# EAGLE board TiltyDuo Panel (EAGLE 6.5.0)
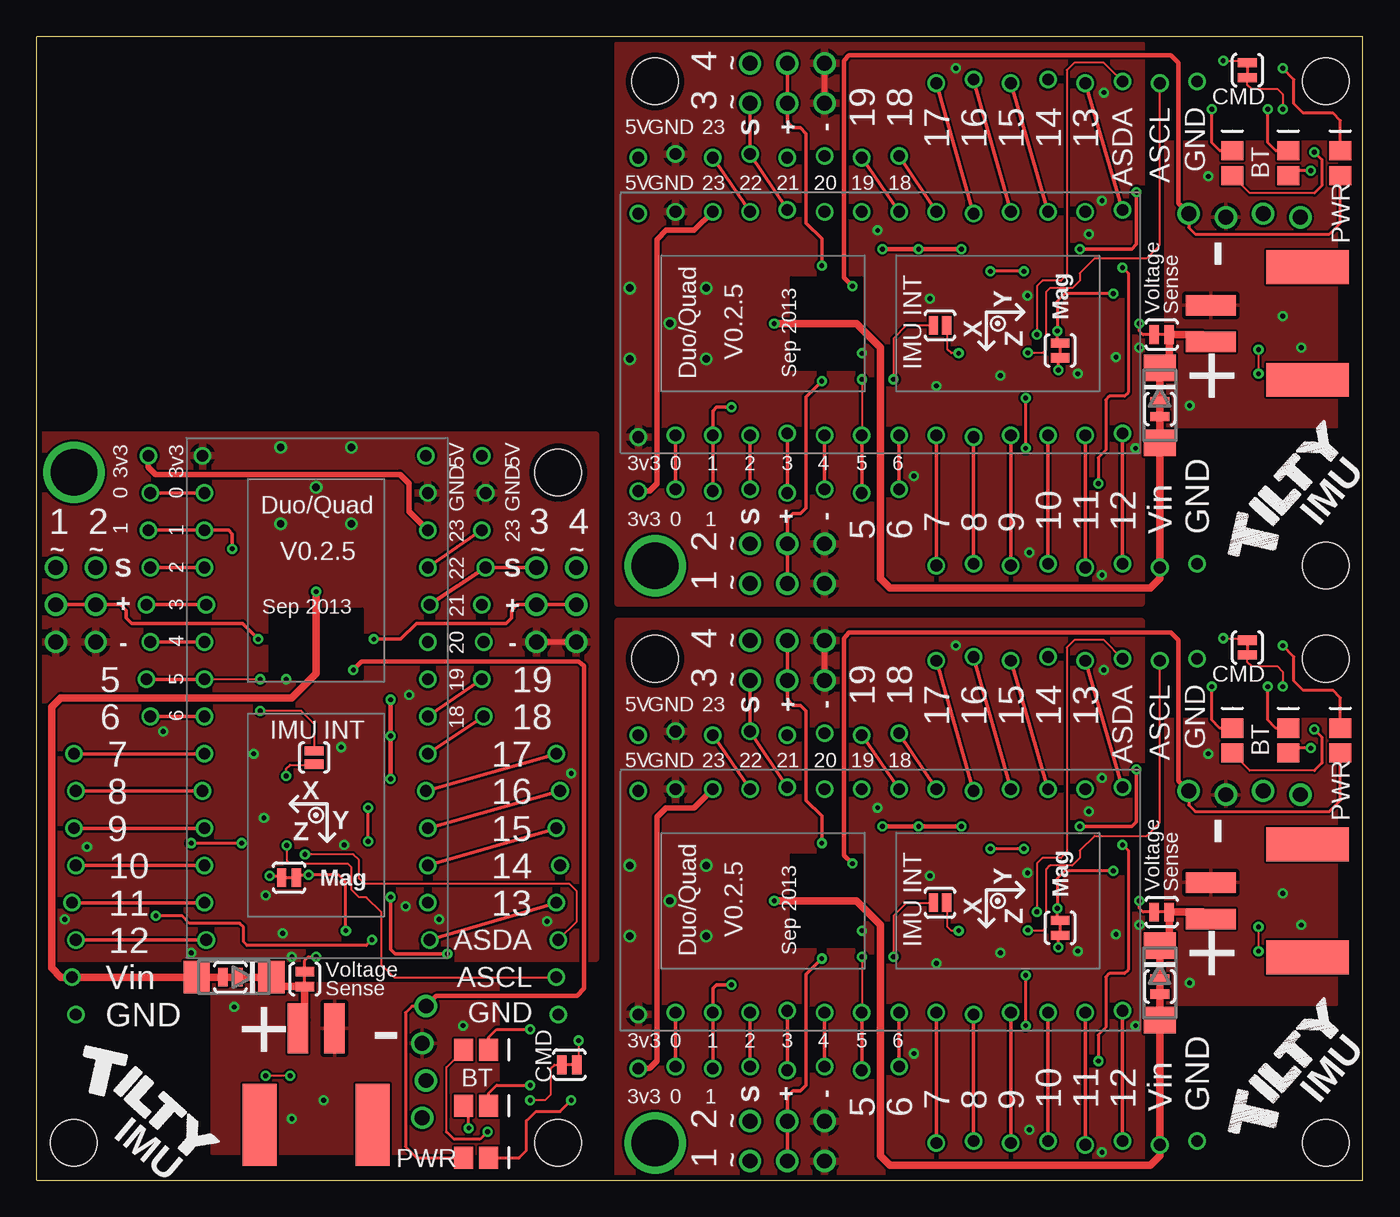
[diagram p0: board, top side]
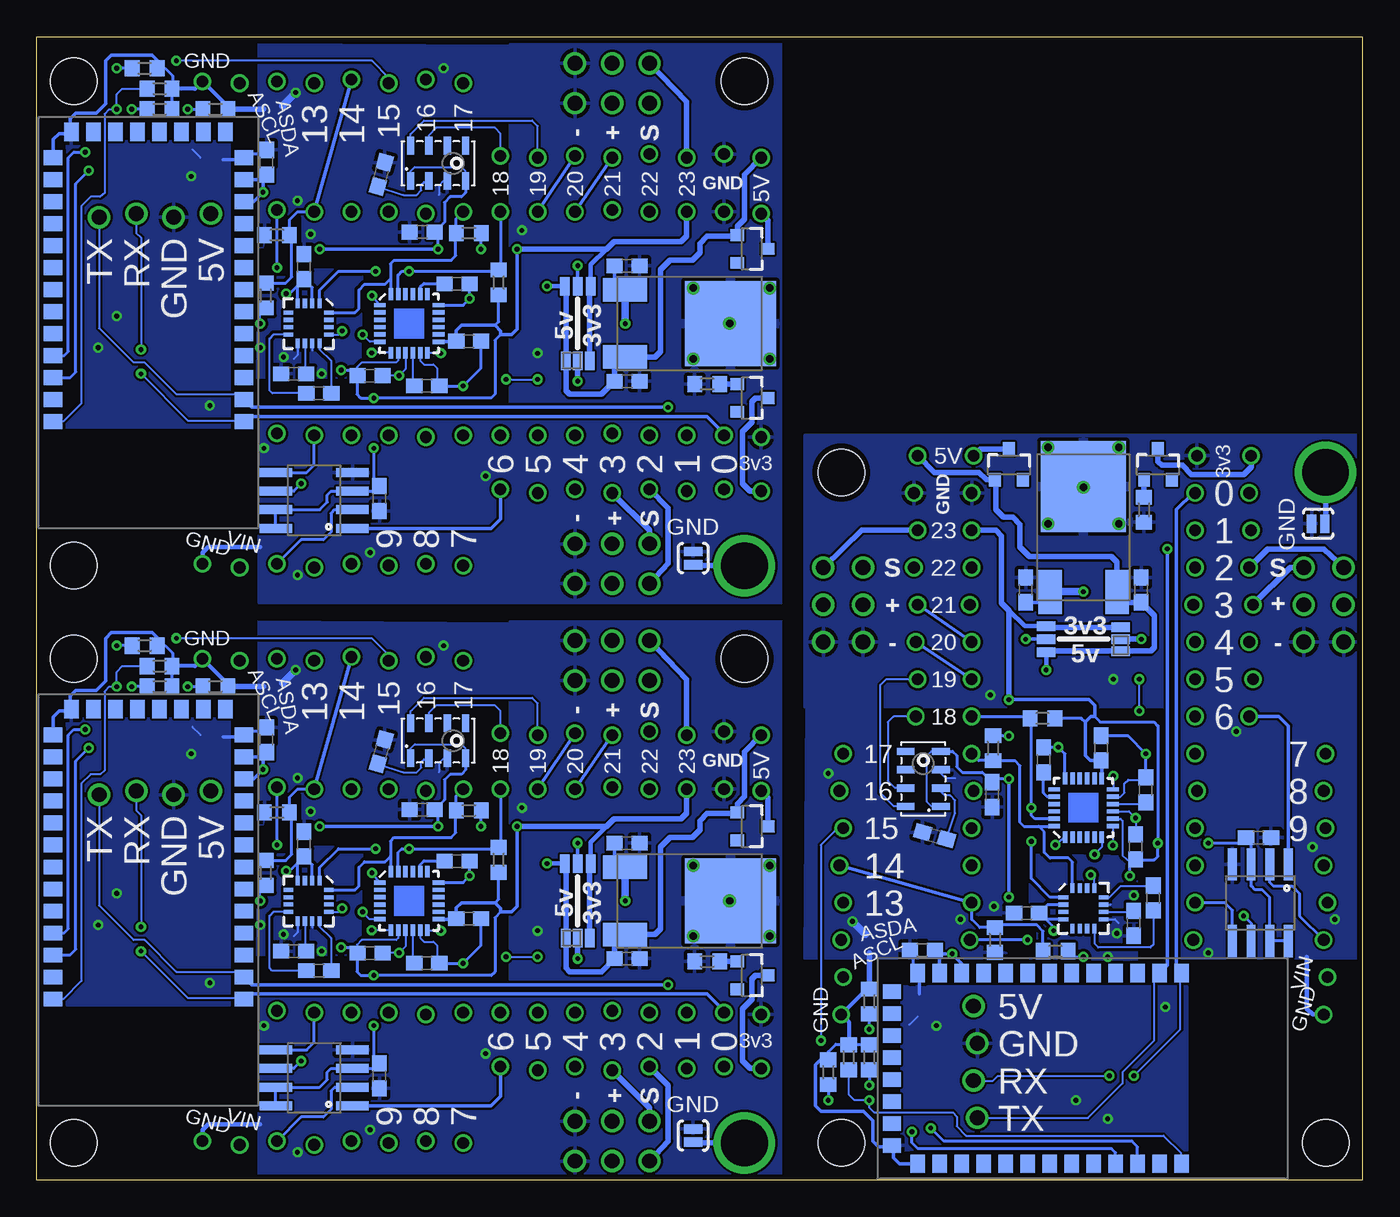
[diagram p1: board, bottom side, seen from below]

Size 90.42 x 77.98 mm. Coordinates in mm from the lower left corner, seen from the top.
Outline: 0,0 90.42,0 90.42,77.98 0,77.98 0,0
Copper layers (1*16): Top 0.0356mm / dielectric 1.5011mm / Bottom 0.0356mm
Design rules "LaenPCBOrder": minimum track width 6mil, minimum drill 13mil, track to track 6mil, track to pad 6mil, pad to pad 6mil, via to via 6mil, smd to smd 6mil, copper to edge 15mil, drill to drill 6mil, minimum pad ring 7mil, minimum via ring 7mil, stop-mask expansion 4mil, vias tented up to drill 0mil, thermal gap 10mil
Holes 3.17 mm at 35.56,48.26 35.56,2.54 2.54,2.54 42.16,35.56 87.88,35.56 87.88,2.54 42.16,74.93 87.88,74.93 87.88,41.91

## Footprints (pad centres in the part's own frame; a part is rotated, then mirrored left to right if it is on the bottom)
C0603 = smd 1.1 x 1: 1 -0.85,0; 2 0.85,0
LED-0805 = smd 1.3 x 1.5: 1 -0.85,0; 2 0.85,0
SOT23-3 = smd 0.8 x 0.9: 1 -0.95,-1; 2 0.95,-1; 3 0,1.1
DO214AA = smd 1.8 x 2.2: A 2.55,0; C -2.55,0
8-PIN_RECEPTACLE_LOCK_NO-SS = drill 0.8: P$1 -8.89,-0.127; P$2 -6.35,0.127; P$3 -3.81,-0.127; P$4 -1.27,0.127; P$5 1.27,-0.127; P$6 3.81,0; P$7 6.35,-0.127; P$8 8.89,0
2-POS_SMD_TERMINAL_BLOCK = smd 2.3 x 5.6: P$1 -3.85,-2.325; P$2 3.85,-2.325 | smd 1.4 x 3.4: P$3 -1.25,4.275; P$4 1.25,4.275
2X03_NO_SS_LOCK = drill 1.016: 1 -2.54,-1.359; 2 -2.54,1.359; 3 0,-1.359; 4 0,1.359; 5 2.54,-1.359; 6 2.54,1.359
1X04_NO_SS_LOCKING = drill 1.016: 1 -3.81,0.127; 2 -1.27,-0.127; 3 1.27,0.127; 4 3.81,-0.127
SJ_2S-NO = smd 0.635 x 1.27: 1 -0.45,0; 2 0.45,0
R0603 = smd 1 x 1.1: 1 -0.85,0; 2 0.85,0
SJ_3_PASTE1&2 = smd 0.635 x 1.27: 1 -0.813,0; 2 0,0; 3 0.813,0
SJ_3 = smd 0.635 x 1.27: 1 -0.889,0; 2 0,0; 3 0.889,0
SJ_2S-TRACE = smd 0.635 x 1.27: 1 -0.508,0; 2 0.508,0
28-DIP = drill 0.8: P$1 -7.747,16.51; P$2 -7.62,13.97; P$3 -7.62,11.43; P$4 -7.62,8.89; P$5 -7.493,6.35; P$6 -7.62,3.81; P$7 -7.62,1.27; P$8 -7.62,-1.27; P$9 -7.62,-3.81; P$10 -7.747,-6.35; P$11 -7.62,-8.89; P$12 -7.62,-11.43; P$13 -7.62,-13.97; P$14 -7.493,-16.51; P$15 7.493,16.51; P$16 7.62,13.97; P$17 7.62,11.43; P$18 7.62,8.89; P$19 7.747,6.35; P$20 7.62,3.81; P$21 7.62,1.27; P$22 7.62,-1.27; P$23 7.62,-3.81; P$24 7.493,-6.35; P$25 7.62,-8.89; P$26 7.62,-11.43; P$27 7.62,-13.97; P$28 7.747,-16.51
HC-09_BREAKOUT = smd 1.25 x 1: P$1 -6.5,10.5; P$2 -6.5,9; P$3 -6.5,7.5; P$4 -6.5,6; P$5 -6.5,3; P$6 -6.5,4.5; P$7 -6.5,1.5; P$8 -6.5,0; P$9 -6.5,-1.5; P$10 -6.5,-3; P$11 -6.5,-4.5; P$12 -6.5,-6; P$13 -6.5,-7.5; P$22 6.5,-7.5; P$23 6.5,-6; P$24 6.5,-4.5; P$25 6.5,-3; P$26 6.5,-1.5; P$27 6.5,0; P$28 6.5,1.5; P$29 6.5,3; P$30 6.5,4.5; P$31 6.5,6; P$32 6.5,7.5; P$33 6.5,9; P$34 6.5,10.5 | smd 1 x 1.25: P$14 -5.25,-9.25; P$15 -3.75,-9.25; P$16 -2.25,-9.25; P$17 -0.75,-9.25; P$18 0.75,-9.25; P$19 2.25,-9.25; P$20 3.75,-9.25; P$21 5.25,-9.25
LGA8 = smd 1.2 x 0.5: 1 -1.2,1.875; 2 -1.2,0.625; 3 -1.2,-0.625; 4 -1.2,-1.875; 5 1.2,-1.875; 6 1.2,-0.625; 7 1.2,0.625; 8 1.2,1.875
TO263 = smd 5.791 x 6.198: P$1 0,2.794 | smd 1.6 x 2.997: P$2 -2.286,-4.394; P$3 2.286,-4.394
QFN-24 = smd 0.8 x 0.3: 1 -2,1.25; 2 -2,0.75; 3 -2,0.25; 4 -2,-0.25; 5 -2,-0.75; 6 -2,-1.25; 13 2,-1.25; 14 2,-0.75; 15 2,-0.25; 16 2,0.25; 17 2,0.75; 18 2,1.25 | smd 0.3 x 0.8: 7 -1.25,-2; 8 -0.75,-2; 9 -0.25,-2; 10 0.25,-2; 11 0.75,-2; 12 1.25,-2; 19 1.25,2; 20 0.75,2; 21 0.25,2; 22 -0.25,2; 23 -0.75,2; 24 -1.25,2
16LPCC = smd 0.65 x 0.28: 1 -1.37,0.75; 2 -1.37,0.25; 3 -1.37,-0.25; 4 -1.37,-0.75; 9 1.37,-0.75; 10 1.37,-0.25; 11 1.37,0.25; 12 1.37,0.75 | smd 0.28 x 0.65: 5 -0.75,-1.37; 6 -0.25,-1.37; 7 0.25,-1.37; 8 0.75,-1.37; 13 0.75,1.37; 14 0.25,1.37; 15 -0.25,1.37; 16 -0.75,1.37
SO08 = smd 0.61 x 2.21: 1 -1.905,-2.616; 2 -0.635,-2.616; 3 0.635,-2.616; 4 1.905,-2.616; 5 1.905,2.616; 6 0.635,2.616; 7 -0.635,2.616; 8 -1.905,2.616

## Placement (x,y rotation side)
C1  0.1uF  [C0603]  14.8,26.61 90 bottom
C2  0.1uF  [C0603]  17.84,29.46 270 bottom
C3  2.2nF  [C0603]  21.75,28.66 90 bottom
C4  0.1uF  [C0603]  22.99,40.26 90 bottom
C5  4.7uF  [C0603]  15.11,40.26 90 bottom
C6  0.1uF  [C0603]  22.92,18.22 180 bottom
C7  0.22uF  [C0603]  14.29,19.24 90 bottom
C8  4.7uF  [C0603]  15.62,17.53 270 bottom
C9  0.1uF  [C0603]  30.04,15.68 180 bottom
C10  0.1uF  [C0603]  29.21,23.5 164.1 bottom
C11  0.1uF  [C0603]  15.49,22.73 270 bottom
C12  0.1uF  [C0603]  25.27,26.29 90 bottom
C13  0.1uF  [C0603]  7.11,23.37 180 bottom
C14  0.1uF  [C0603]  63.82,14.8 0 bottom
C15  0.1uF  [C0603]  60.96,17.84 180 bottom
C16  2.2nF  [C0603]  61.76,21.75 0 bottom
C17  0.1uF  [C0603]  50.16,22.99 0 bottom
C18  4.7uF  [C0603]  50.16,15.11 0 bottom
C19  0.22uF  [C0603]  71.18,14.29 0 bottom
C20  4.7uF  [C0603]  72.9,15.62 180 bottom
C21  0.1uF  [C0603]  72.2,22.92 90 bottom
C22  0.1uF  [C0603]  74.74,30.04 90 bottom
C23  0.1uF  [C0603]  66.93,29.21 74.1 bottom
C24  0.1uF  [C0603]  67.69,15.49 180 bottom
C25  0.1uF  [C0603]  64.14,25.27 0 bottom
C26  0.1uF  [C0603]  67.06,7.11 90 bottom
C27  0.1uF  [C0603]  63.82,54.17 0 bottom
C28  0.1uF  [C0603]  60.96,57.21 180 bottom
C29  2.2nF  [C0603]  61.76,61.12 0 bottom
C30  0.1uF  [C0603]  50.16,62.36 0 bottom
C31  4.7uF  [C0603]  50.16,54.48 0 bottom
C32  0.22uF  [C0603]  71.18,53.66 0 bottom
C33  4.7uF  [C0603]  72.9,54.99 180 bottom
C34  0.1uF  [C0603]  72.2,62.29 90 bottom
C35  0.1uF  [C0603]  74.74,69.41 90 bottom
C36  0.1uF  [C0603]  66.93,68.58 74.1 bottom
C37  0.1uF  [C0603]  67.69,54.86 180 bottom
C38  0.1uF  [C0603]  64.14,64.64 0 bottom
C39  0.1uF  [C0603]  67.06,46.48 90 bottom
D1  RED  [LED-0805]  29.97,8.89 0 top
D2  GREEN  [LED-0805]  29.97,1.52 0 top
D3  YELLOW  [LED-0805]  29.97,5.08 0 top
D4  [SOT23-3]  24.13,48.77 0 bottom
D5  [SOT23-3]  13.97,48.77 0 bottom
D6  [DO214AA]  13.46,13.84 180 top
D7  RED  [LED-0805]  81.53,29.97 90 top
D8  GREEN  [LED-0805]  88.9,29.97 90 top
D9  YELLOW  [LED-0805]  85.34,29.97 90 top
D10  [SOT23-3]  41.66,24.13 270 bottom
D11  [SOT23-3]  41.66,13.97 270 bottom
D12  [DO214AA]  76.58,13.46 270 top
D13  RED  [LED-0805]  81.53,69.34 90 top
D14  GREEN  [LED-0805]  88.9,69.34 90 top
D15  YELLOW  [LED-0805]  85.34,69.34 90 top
D16  [SOT23-3]  41.66,63.5 270 bottom
D17  [SOT23-3]  41.66,53.34 270 bottom
D18  [DO214AA]  76.58,52.83 270 top
JP1  8-PIN_HEADER  [8-PIN_RECEPTACLE_LOCK_NO-SS]  7.62,40.51 90 top
JP2  8-PIN_HEADER  [8-PIN_RECEPTACLE_LOCK_NO-SS]  2.54,20.19 90 top
JP3  8-PIN_HEADER  [8-PIN_RECEPTACLE_LOCK_NO-SS]  35.56,20.19 270 top
JP4  8-PIN_HEADER  [8-PIN_RECEPTACLE_LOCK_NO-SS]  30.48,40.51 270 top
JP5  2-POS_SMD_TERM_BLOCK  [2-POS_SMD_TERMINAL_BLOCK]  19.05,6.1 0 top
JP6  [2X03_NO_SS_LOCK]  2.67,39.24 90 top
JP7  [2X03_NO_SS_LOCK]  35.43,39.24 90 top
JP8  2-POS_SMD_TERM_BLOCK  [2-POS_SMD_TERMINAL_BLOCK]  84.33,19.05 90 top
JP9  [1X04_NO_SS_LOCKING]  26.42,8.06 90 top
JP10  [2X03_NO_SS_LOCK]  51.18,2.67 180 top
JP11  [2X03_NO_SS_LOCK]  51.18,35.43 180 top
JP12  [1X04_NO_SS_LOCKING]  82.36,26.42 180 top
JP13  8-PIN_HEADER  [8-PIN_RECEPTACLE_LOCK_NO-SS]  49.91,30.48 0 top
JP14  8-PIN_HEADER  [8-PIN_RECEPTACLE_LOCK_NO-SS]  70.23,35.56 0 top
JP15  8-PIN_HEADER  [8-PIN_RECEPTACLE_LOCK_NO-SS]  70.23,2.54 180 top
JP16  8-PIN_HEADER  [8-PIN_RECEPTACLE_LOCK_NO-SS]  49.91,7.62 180 top
JP17  2-POS_SMD_TERM_BLOCK  [2-POS_SMD_TERMINAL_BLOCK]  84.33,58.42 90 top
JP18  [2X03_NO_SS_LOCK]  51.18,42.04 180 top
JP19  [2X03_NO_SS_LOCK]  51.18,74.8 180 top
JP20  [1X04_NO_SS_LOCKING]  82.36,65.79 180 top
JP21  8-PIN_HEADER  [8-PIN_RECEPTACLE_LOCK_NO-SS]  49.91,69.85 0 top
JP22  8-PIN_HEADER  [8-PIN_RECEPTACLE_LOCK_NO-SS]  70.23,74.93 0 top
JP23  8-PIN_HEADER  [8-PIN_RECEPTACLE_LOCK_NO-SS]  70.23,41.91 180 top
JP24  8-PIN_HEADER  [8-PIN_RECEPTACLE_LOCK_NO-SS]  49.91,46.99 180 top
MPU_INT  SOLDERJUMPERNO  [SJ_2S-NO]  18.92,28.83 270 top
MPU_INT1  SOLDERJUMPERNO  [SJ_2S-NO]  61.59,18.92 0 top
MPU_INT2  SOLDERJUMPERNO  [SJ_2S-NO]  61.59,58.29 0 top
R1  4.7K  [R0603]  21.84,31.5 0 bottom
R2  4.7K  [R0603]  25.21,29.46 90 bottom
R3  180  [R0603]  33.66,12.19 270 bottom
R4  68  [R0603]  36.45,7.37 90 bottom
R5  10k  [R0603]  20.95,15.62 180 bottom
R6  680  [R0603]  25.08,16.38 90 bottom
R7  10K  [R0603]  35.05,8.38 270 bottom
R8  68  [R0603]  33.66,8.38 270 bottom
R9  [R0603]  14.92,45.72 90 bottom
R10  4.7K  [R0603]  58.93,21.84 270 bottom
R11  4.7K  [R0603]  60.96,25.21 0 bottom
R12  10k  [R0603]  74.8,20.95 90 bottom
R13  680  [R0603]  74.04,25.08 0 bottom
R14  10K  [R0603]  82.04,35.05 180 bottom
R15  180  [R0603]  78.23,33.66 180 bottom
R16  68  [R0603]  82.04,33.66 180 bottom
R17  68  [R0603]  83.06,36.45 0 bottom
R18  [R0603]  44.7,14.92 0 bottom
R19  4.7K  [R0603]  58.93,61.21 270 bottom
R20  4.7K  [R0603]  60.96,64.58 0 bottom
R21  10k  [R0603]  74.8,60.33 90 bottom
R22  680  [R0603]  74.04,64.45 0 bottom
R23  10K  [R0603]  82.04,74.42 180 bottom
R24  180  [R0603]  78.23,73.03 180 bottom
R25  68  [R0603]  82.04,73.03 180 bottom
R26  68  [R0603]  83.06,75.82 0 bottom
R27  [R0603]  44.7,54.29 0 bottom
SJ1  SOLDERJUMPERNO  [SJ_2S-NO]  3.05,44.77 180 bottom
SJ2  [SJ_3_PASTE1&2]  16.51,36.89 90 bottom
SJ3  [SJ_3]  21.59,36.89 90 bottom
SJ4  SOLDERJUMPERTRACE  [SJ_2S-TRACE]  18.29,13.72 90 top
SJ5  SOLDERJUMPERTRACE  [SJ_2S-TRACE]  36.32,7.87 180 top
SJ6  SOLDERJUMPERTRACE  [SJ_2S-TRACE]  13.21,13.84 0 top
SJ7  SOLDERJUMPERTRACE  [SJ_2S-TRACE]  17.21,20.64 0 top
SJ8  SOLDERJUMPERNO  [SJ_2S-NO]  45.66,3.05 90 bottom
SJ9  [SJ_3]  53.53,21.59 0 bottom
SJ10  [SJ_3_PASTE1&2]  53.53,16.51 0 bottom
SJ11  SOLDERJUMPERTRACE  [SJ_2S-TRACE]  76.71,18.29 180 top
SJ12  SOLDERJUMPERTRACE  [SJ_2S-TRACE]  76.58,13.21 90 top
SJ13  SOLDERJUMPERTRACE  [SJ_2S-TRACE]  82.55,36.32 270 top
SJ14  SOLDERJUMPERTRACE  [SJ_2S-TRACE]  69.79,17.21 90 top
SJ15  SOLDERJUMPERNO  [SJ_2S-NO]  45.66,42.42 90 bottom
SJ16  [SJ_3]  53.53,60.96 0 bottom
SJ17  [SJ_3_PASTE1&2]  53.53,55.88 0 bottom
SJ18  SOLDERJUMPERTRACE  [SJ_2S-TRACE]  76.71,57.66 180 top
SJ19  SOLDERJUMPERTRACE  [SJ_2S-TRACE]  76.58,52.58 90 top
SJ20  SOLDERJUMPERTRACE  [SJ_2S-TRACE]  82.55,75.69 270 top
SJ21  SOLDERJUMPERTRACE  [SJ_2S-TRACE]  69.79,56.58 90 top
U1  TEENSY_3.0_OUTER-PINS28-DIP_SOCKET  [28-DIP]  19.05,32.89 0 top
U2  HC-09_BREAKOUT  [HC-09_BREAKOUT]  22.86,7.62 270 bottom
U3  MPL3115A2LGA8  [LGA8]  29.97,27.37 180 bottom
U4  LM2931  [TO263]  19.05,44.51 0 bottom
U5  MPU-6050  [QFN-24]  19.05,25.4 90 bottom
U6  HMC5883LSMD  [16LPCC]  19.05,18.54 0 bottom
U7  SPI_FLASH-X25XXSMD  [SO08]  6.99,18.92 180 bottom
U8  MPU-6050  [QFN-24]  65.02,19.05 0 bottom
U9  HC-09_BREAKOUT  [HC-09_BREAKOUT]  82.8,22.86 180 bottom
U10  LM2931  [TO263]  45.91,19.05 270 bottom
U11  TEENSY_3.0_OUTER-PINS28-DIP_SOCKET  [28-DIP]  57.53,19.05 90 top
U12  HMC5883LSMD  [16LPCC]  71.88,19.05 270 bottom
U13  MPL3115A2LGA8  [LGA8]  63.06,29.97 90 bottom
U14  SPI_FLASH-X25XXSMD  [SO08]  71.5,6.99 90 bottom
U15  MPU-6050  [QFN-24]  65.02,58.42 0 bottom
U16  HC-09_BREAKOUT  [HC-09_BREAKOUT]  82.8,62.23 180 bottom
U17  LM2931  [TO263]  45.91,58.42 270 bottom
U18  TEENSY_3.0_OUTER-PINS28-DIP_SOCKET  [28-DIP]  57.53,58.42 90 top
U19  HMC5883LSMD  [16LPCC]  71.88,58.42 270 bottom
U20  MPL3115A2LGA8  [LGA8]  63.06,69.34 90 bottom
U21  SPI_FLASH-X25XXSMD  [SO08]  71.5,46.35 90 bottom

## Library data of the parts
C1 C6 C9 C10 C13 C14 C21-C23 C26 C27 C34-C36 C39 = resistor; RATED_VOLTAGE: 2
C2 C4 C5 C11 C12 C15 C17 C18 C24 C25 C28 C30 C31 C37 C38 R1-R27 = resistor
C3 C16 C29 = resistor; RATED_VOLTAGE: 50
C7 C8 C19 C20 C32 C33 = resistor; ESR: <200mOhms
D1-D3 D7-D9 D13-D15 = SparkFun-LED
D4 D10 D16 = SparkFun-DiscreteSemi; PART#: BAT54FSTR-ND
D5 D11 D17 = SparkFun-DiscreteSemi; PART#: BZX84C3V3LT1GOSCT-ND; PART#2: MMBZ5226B-FDICT-ND
D6 D12 D18 = diode
JP1-JP4 JP13-JP16 JP21-JP24 = My Parts
JP5 JP8 JP17 = My Parts; PART#: 277-2337-1-ND; POSSIBLE_ALT: 009276002021106
JP6 JP7 JP9-JP12 JP18-JP20 = pinhead
MPU_INT MPU_INT1 MPU_INT2 SJ1-SJ21 = SparkFun-Passives
U1 U11 U18 = My Parts; COST: 0.28; PART#: AE10004-ND; PART#2: A28-LC-TR-R; PART#3: ED3052-5-ND
U2 U9 U16 = csr
U3 U5 U8 U13 U15 U20 = SparkFun-Sensors
U4 U10 U17 = on-semiconductor; COST: 0.53
U6 U12 U19 = SparkFun
U7 U14 U21 = SparkFun-DigitalIC; PART#: S25FL204K0TMFI043

## Nets
5V: C5.1 D2.1 D4.1 JP4.P$1 JP9.4 SJ2.1 SJ3.1 U4.P$3
5V1: C18.1 D8.1 D10.1 JP12.4 JP13.P$1 SJ9.1 SJ10.1 U10.P$3
5V2: C31.1 D14.1 D16.1 JP20.4 JP21.P$1 SJ16.1 SJ17.1 U17.P$3
AUXCL [I/O]: JP3.P$7 U5.7
AUXCL1 [I/O]: JP14.P$7 U8.7
AUXCL2 [I/O]: JP22.P$7 U15.7
AUXDA [I/O]: JP3.P$6 U5.6
AUXDA1 [I/O]: JP14.P$6 U8.6
AUXDA2 [I/O]: JP22.P$6 U15.6
BATT_SENSE: JP3.P$4 R5.2 R6.2 U1.P$27
BATT_SENSE1: JP14.P$4 R12.2 R13.2 U11.P$27
BATT_SENSE2: JP22.P$4 R21.2 R22.2 U18.P$27
BT_CMD: JP3.P$3 SJ5.1 U1.P$26
BT_CMD1: JP14.P$3 SJ13.1 U11.P$26
BT_CMD2: JP22.P$3 SJ20.1 U18.P$26
CHASSIS_GND: SJ1.1
CHASSIS_GND1: SJ8.1
CHASSIS_GND2: SJ15.1
CMD: R7.2 SJ5.2 U2.P$34
CMD1: R14.2 SJ13.2 U9.P$34
CMD2: R23.2 SJ20.2 U16.P$34
CS: JP1.P$1 U1.P$8 U7.1
CS1: JP16.P$1 U11.P$8 U14.1
CS2: JP24.P$1 U18.P$8 U21.1
GND: C1.2 C2.1 C3.2 C4.2 C5.2 C6.2 C8.2 C9.2 C10.2 C11.1 C12.1 C13.1 JP2.P$1 JP3.P$8 JP4.P$2 JP5.P$4 JP6.1 JP6.2 JP7.1 JP7.2 JP9.3 R3.1 R4.2 R6.1 R7.1 R8.1 R9.1 SJ1.2 U1.P$1 U1.P$16 U2.P$13 U2.P$21 U2.P$22 U3.3 U4.P$1 U5.1 U5.9 U5.11 U5.18 U6.9 U6.11 U7.4
GND1: C14.2 C15.1 C16.2 C17.2 C18.2 C20.2 C21.2 C22.2 C23.2 C24.1 C25.1 C26.1 JP8.P$4 JP10.1 JP10.2 JP11.1 JP11.2 JP12.3 JP13.P$2 JP14.P$8 JP15.P$1 R13.1 R14.1 R15.1 R16.1 R17.2 R18.1 SJ8.2 U8.1 U8.9 U8.11 U8.18 U9.P$13 U9.P$21 U9.P$22 U10.P$1 U11.P$1 U11.P$16 U12.9 U12.11 U13.3 U14.4
GND2: C27.2 C28.1 C29.2 C30.2 C31.2 C33.2 C34.2 C35.2 C36.2 C37.1 C38.1 C39.1 JP17.P$4 JP18.1 JP18.2 JP19.1 JP19.2 JP20.3 JP21.P$2 JP22.P$8 JP23.P$1 R22.1 R23.1 R24.1 R25.1 R26.2 R27.1 SJ15.2 U15.1 U15.9 U15.11 U15.18 U16.P$13 U16.P$21 U16.P$22 U17.P$1 U18.P$1 U18.P$16 U19.9 U19.11 U20.3 U21.4
I/O1: JP1.P$5 JP6.6 U1.P$4
I/O2: JP1.P$4 JP6.5 U1.P$5
I/O3: JP4.P$3 JP7.5 U1.P$18
I/O4: JP4.P$4 JP7.6 U1.P$19
I/O5: JP10.6 JP16.P$5 U11.P$4
I/O6: JP10.5 JP16.P$4 U11.P$5
I/O7: JP11.6 JP13.P$4 U11.P$19
I/O8: JP11.5 JP13.P$3 U11.P$18
I/O9: JP18.6 JP24.P$5 U18.P$4
I/O10: JP18.5 JP24.P$4 U18.P$5
I/O11: JP19.6 JP21.P$4 U18.P$19
I/O12: JP19.5 JP21.P$3 U18.P$18
MISO: JP2.P$3 U1.P$14 U7.2
MISO1: JP15.P$3 U11.P$14 U14.2
MISO2: JP23.P$3 U18.P$14 U21.2
MOSI: JP2.P$4 U1.P$13 U7.5
MOSI1: JP15.P$4 U11.P$13 U14.5
MOSI2: JP23.P$4 U18.P$13 U21.5
MPU_INT: JP1.P$2 MPU_INT.1 U1.P$7
MPU_INT1: JP16.P$2 MPU_INT1.1 U11.P$7
MPU_INT2: JP24.P$2 MPU_INT2.1 U18.P$7
N$1: C1.1 U5.10
N$2: C3.1 U5.20
N$3: D1.2 R3.2
N$5: C7.1 U6.8
N$6: C7.2 U6.12
N$7: JP1.P$3 U1.P$6
N$8: JP2.P$5 U1.P$12
N$9: R5.1 SJ4.2
N$10: JP3.P$1 U1.P$24
N$11: C8.1 U6.10
N$12: JP2.P$6 U1.P$11
N$13: D2.2 R4.1
N$14: D1.1 U2.P$31
N$15: D4.3 U1.P$15
N$16: MPU_INT.2 U5.12
N$17 [3.3V]: C6.1 SJ7.2 U6.2 U6.4 U6.13
N$18: JP4.P$5 U1.P$20
N$19: JP4.P$6 U1.P$21
N$21: C10.1 U3.2
N$22: D5.1 R9.2
N$23: JP3.P$2 U1.P$25
N$24: D3.2 R8.2
N$27: C14.1 U8.10
N$29: C16.1 U8.20
N$30: JP16.P$3 U11.P$6
N$31: JP15.P$6 U11.P$11
N$32: JP13.P$5 U11.P$20
N$33: JP13.P$6 U11.P$21
N$34: JP14.P$2 U11.P$25
N$35: C19.1 U12.8
N$36: C19.2 U12.12
N$37: C20.1 U12.10
N$38: MPU_INT1.2 U8.12
N$40: C23.1 U13.2
N$41: D7.2 R15.2
N$43: D9.2 R16.2
N$47: JP14.P$1 U11.P$24
N$48: D8.2 R17.1
N$49: R12.1 SJ11.2
N$50: D7.1 U9.P$31
N$51: JP15.P$5 U11.P$12
N$52: D10.3 U11.P$15
N$53 [3.3V]: C21.1 SJ14.2 U12.2 U12.4 U12.13
N$54: D11.1 R18.2
N$55: C27.1 U15.10
N$56: C29.1 U15.20
N$57: JP24.P$3 U18.P$6
N$58: JP23.P$6 U18.P$11
N$59: JP21.P$5 U18.P$20
N$60: JP21.P$6 U18.P$21
N$61: JP22.P$2 U18.P$25
N$62: C32.1 U19.8
N$63: C32.2 U19.12
N$64: C33.1 U19.10
N$65: MPU_INT2.2 U15.12
N$67: C36.1 U20.2
N$68: D13.2 R24.2
N$70: D15.2 R25.2
N$74: JP22.P$1 U18.P$24
N$75: D14.2 R26.1
N$76: R21.1 SJ18.2
N$77: D13.1 U16.P$31
N$78: JP23.P$5 U18.P$12
N$79: D16.3 U18.P$15
N$80 [3.3V]: C34.1 SJ21.2 U19.2 U19.4 U19.13
N$81: D17.1 R27.2
POW_I/O1: JP6.3 JP6.4 SJ2.2
POW_I/O2: JP7.3 JP7.4 SJ3.2
POW_I/O3: JP11.3 JP11.4 SJ9.2
POW_I/O4: JP10.3 JP10.4 SJ10.2
POW_I/O5: JP19.3 JP19.4 SJ16.2
POW_I/O6: JP18.3 JP18.4 SJ17.2
RX1: JP1.P$7 JP9.2 U1.P$2 U2.P$1
RX2: JP15.P$8 U11.P$9
RX3: JP2.P$8 U1.P$9
RX4: JP12.2 JP16.P$7 U9.P$1 U11.P$2
RX5: JP23.P$8 U18.P$9
RX6: JP20.2 JP24.P$7 U16.P$1 U18.P$2
SCK: JP3.P$5 U1.P$28 U7.6
SCK1: JP14.P$5 U11.P$28 U14.6
SCK2: JP22.P$5 U18.P$28 U21.6
SCL [I/O]: JP4.P$7 R1.1 U1.P$22 U3.8 U5.23 U6.1
SCL1 [I/O]: JP13.P$7 R10.1 U8.23 U11.P$22 U12.1 U13.8
SCL2 [I/O]: JP21.P$7 R19.1 U15.23 U18.P$22 U19.1 U20.8
SDA [I/O]: JP4.P$8 R2.1 U1.P$23 U3.7 U5.24 U6.16
SDA1 [I/O]: JP13.P$8 R11.1 U8.24 U11.P$23 U12.16 U13.7
SDA2 [I/O]: JP21.P$8 R20.1 U15.24 U18.P$23 U19.16 U20.7
TEENSY_3V1 [3.3V]: C15.2 C22.1 C24.2 C25.2 C26.2 D11.3 JP16.P$8 R10.2 R11.2 SJ9.3 SJ10.3 SJ14.1 U8.8 U8.13 U9.P$11 U9.P$12 U11.P$17 U13.1 U13.4 U14.3 U14.7 U14.8
TEENSY_3V2 [3.3V]: C28.2 C35.1 C37.2 C38.2 C39.2 D17.3 JP24.P$8 R19.2 R20.2 SJ16.3 SJ17.3 SJ21.1 U15.8 U15.13 U16.P$11 U16.P$12 U18.P$17 U20.1 U20.4 U21.3 U21.7 U21.8
TEENSY_3V3 [3.3V]: C2.2 C9.1 C11.2 C12.2 C13.2 D5.3 JP1.P$8 R1.2 R2.2 SJ2.3 SJ3.3 SJ7.1 U1.P$17 U2.P$11 U2.P$12 U3.1 U3.4 U5.8 U5.13 U7.3 U7.7 U7.8
TX1: JP1.P$6 JP9.1 U1.P$3 U2.P$2
TX2: JP15.P$7 U11.P$10
TX3: JP2.P$7 U1.P$10
TX4: JP12.1 JP16.P$6 U9.P$2 U11.P$3
TX5: JP23.P$7 U18.P$10
TX6: JP20.1 JP24.P$6 U16.P$2 U18.P$3
VBATT: C4.1 D6.A D6.C JP2.P$2 JP5.P$3 SJ4.1 SJ6.1 SJ6.2 U4.P$2
VBATT1: C17.1 D12.A D12.C JP8.P$3 JP15.P$2 SJ11.1 SJ12.1 SJ12.2 U10.P$2
VBATT2: C30.1 D18.A D18.C JP17.P$3 JP23.P$2 SJ18.1 SJ19.1 SJ19.2 U17.P$2
YEL_LED: D3.1 U2.P$32
YEL_LED1: D9.1 U9.P$32
YEL_LED2: D15.1 U16.P$32

## Tracks (layer width: path | path; a pad name or v marks a point on that pad's centre or on a via)
5V  (via drill 0.33)
  Top 0.203: D2.1 25.91,1.52 25.15,2.29 25.15,11.43 25.59,11.87 JP9.4
  Top 0.305: 36.83,12.57 37.34,13.08
  Top 0.318: 37.34,13.08 37.34,35.05 36.96,35.37 22.16,35.37 v21.59,34.8 | 36.83,12.57 27.24,12.57 JP9.4
  Bottom 0.318: SJ3.1 v21.59,34.8
  Bottom 0.381: JP4.P$1 29.21,48.26 26.16,48.26 25.67,47.77 D4.1 25.02,47.71 25.02,45.72 24.51,45.21 23.88,45.21 23.37,44.7 23.37,43.18 22.73,42.55 17.14,42.55 16.76,42.16 U4.P$3 16.76,39.41 C5.1 14.22,38.52 14.22,36.32 14.46,36.08 SJ2.1 21.51,36.08 SJ3.1
  Bottom 0.508: 16.75,40.17 U4.P$3 16.71,40.17
5V1  (via drill 0.33)
  Top 0.203: D8.1 88.9,25.91 88.14,25.15 78.99,25.15 78.55,25.59 JP12.4
  Top 0.305: 77.85,36.83 77.34,37.34
  Top 0.318: 77.34,37.34 55.37,37.34 55.05,36.96 55.05,22.16 v55.63,21.59 | 77.85,36.83 77.85,27.24 JP12.4
  Bottom 0.318: SJ9.1 v55.63,21.59
  Bottom 0.381: JP13.P$1 42.16,29.21 42.16,26.16 42.66,25.67 D10.1 42.72,25.02 44.7,25.02 45.21,24.51 45.21,23.88 45.72,23.37 47.24,23.37 47.88,22.73 47.88,17.14 48.26,16.76 U10.P$3 51.02,16.76 C18.1 51.9,14.22 54.1,14.22 54.34,14.46 SJ10.1 54.34,21.51 SJ9.1
  Bottom 0.508: 50.25,16.75 U10.P$3 50.25,16.71
5V2  (via drill 0.33)
  Top 0.203: D14.1 88.9,65.28 88.14,64.52 78.99,64.52 78.55,64.96 JP20.4
  Top 0.305: 77.85,76.2 77.34,76.71
  Top 0.318: 77.34,76.71 55.37,76.71 55.05,76.33 55.05,61.53 v55.63,60.96 | 77.85,76.2 77.85,66.61 JP20.4
  Bottom 0.318: SJ16.1 v55.63,60.96
  Bottom 0.381: JP21.P$1 42.16,68.58 42.16,65.53 42.66,65.04 D16.1 42.72,64.39 44.7,64.39 45.21,63.88 45.21,63.25 45.72,62.74 47.24,62.74 47.88,62.1 47.88,56.52 48.26,56.13 U17.P$3 51.02,56.13 C31.1 51.9,53.59 54.1,53.59 54.34,53.84 SJ17.1 54.34,60.88 SJ16.1
  Bottom 0.508: 50.25,56.12 U17.P$3 50.25,56.08
AUXCL  (via drill 0.33)
  Top 0.152: JP3.P$7 24.38,13.84 23.5,14.73 23.5,18.29 22.48,19.3 21.97,19.3 21.46,19.81 21.46,21.34 21.21,21.59 17.27,21.59 17.05,21.81 v17.05,22.83
  Bottom 0.152: U5.7 v17.05,22.83
AUXCL1  (via drill 0.33)
  Top 0.152: JP14.P$7 76.58,24.38 75.69,23.5 72.14,23.5 71.12,22.48 71.12,21.97 70.61,21.46 69.09,21.46 68.83,21.21 68.83,17.27 68.61,17.05 v67.6,17.05
  Bottom 0.152: U8.7 v67.6,17.05
AUXCL2  (via drill 0.33)
  Top 0.152: JP22.P$7 76.58,63.75 75.69,62.87 72.14,62.87 71.12,61.85 71.12,61.34 70.61,60.83 69.09,60.83 68.83,60.58 68.83,56.64 68.61,56.42 v67.6,56.42
  Bottom 0.152: U15.7 v67.6,56.42
AUXDA  (via drill 0.33)
  Top 0.152: v18.29,22.23 21.59,22.23 21.97,21.84 21.97,20.57 22.35,20.19 36.32,20.19 36.83,19.68 36.83,17.65 JP3.P$6
  Bottom 0.152: 17.78,23.38 U5.6 17.8,22.71 v18.29,22.23
AUXDA1  (via drill 0.33)
  Top 0.152: v68.2,18.29 68.2,21.59 68.58,21.97 69.85,21.97 70.23,22.35 70.23,36.32 70.74,36.83 72.77,36.83 JP14.P$6
  Bottom 0.152: 67.04,17.78 U8.6 67.71,17.8 v68.2,18.29
AUXDA2  (via drill 0.33)
  Top 0.152: v68.2,57.66 68.2,60.96 68.58,61.34 69.85,61.34 70.23,61.72 70.23,75.69 70.74,76.2 72.77,76.2 JP22.P$6
  Bottom 0.152: 67.04,57.15 U15.6 67.71,57.17 v68.2,57.66
BATT_SENSE
  Bottom 0.203: 24.99,17.46 R6.2 | R6.2 26.12,17.23 26.67,17.78 U1.P$27 | R5.2 21.8,16.98 22.23,17.4 25.04,17.4 R6.2
  Bottom 0.254: U1.P$27 JP3.P$4
BATT_SENSE1
  Bottom 0.203: 72.96,24.99 R13.2 | R13.2 73.19,26.12 72.64,26.67 U11.P$27 | R12.2 73.44,21.8 73.03,22.23 73.03,25.04 R13.2
  Bottom 0.254: U11.P$27 JP14.P$4
BATT_SENSE2
  Bottom 0.203: 72.96,64.36 R22.2 | R22.2 73.19,65.49 72.64,66.04 U18.P$27 | R21.2 73.44,61.17 73.03,61.59 73.03,64.41 R22.2
  Bottom 0.254: U18.P$27 JP22.P$4
BT_CMD  (via drill 0.33)
  Top 0.152: v36.96,9.53 36.96,8 SJ5.1
  Top 0.254: U1.P$26 JP3.P$3
  Bottom 0.152: v36.96,9.53 36.96,22.86 35.81,24 JP3.P$3
BT_CMD1  (via drill 0.33)
  Top 0.152: v80.9,36.96 82.42,36.96 SJ13.1
  Top 0.254: U11.P$26 JP14.P$3
  Bottom 0.152: v80.9,36.96 67.56,36.96 66.42,35.81 JP14.P$3
BT_CMD2  (via drill 0.33)
  Top 0.152: v80.9,76.33 82.42,76.33 SJ20.1
  Top 0.254: U18.P$26 JP22.P$3
  Bottom 0.152: v80.9,76.33 67.56,76.33 66.42,75.18 JP22.P$3
CHASSIS_GND  (via drill 3.17)
  Bottom 0.381: SJ1.1 2.6,44.96 2.54,45.02 v2.54,48.26
CHASSIS_GND1  (via drill 3.17)
  Bottom 0.381: SJ8.1 45.46,2.6 45.4,2.54 v42.16,2.54
CHASSIS_GND2  (via drill 3.17)
  Bottom 0.381: SJ15.1 45.46,41.97 45.4,41.91 v42.16,41.91
CMD  (via drill 0.33)
  Top 0.152: v33.66,5.46 34.67,5.46 35.05,5.84 35.05,7.62 35.31,7.87 SJ5.2
  Bottom 0.152: U2.P$34 12.38,1.1 12.38,1.84 13.59,3.05 27.05,3.05 27.69,3.68 27.69,4.32 27.94,4.62 33.33,4.62 33.66,4.95 v33.66,5.46 34.67,5.46 35.05,5.84 R7.2 | 12.38,1.14 U2.P$34 | 12,0.64 U2.P$34
CMD1  (via drill 0.33)
  Top 0.152: v84.96,33.66 84.96,34.67 84.58,35.05 82.8,35.05 82.55,35.31 SJ13.2
  Bottom 0.152: U9.P$34 89.33,12.38 88.58,12.38 87.38,13.59 87.38,27.05 86.74,27.69 86.11,27.69 85.8,27.94 85.8,33.33 85.47,33.66 v84.96,33.66 84.96,34.67 84.58,35.05 R14.2 | 89.28,12.38 U9.P$34 | 89.79,12 U9.P$34
CMD2  (via drill 0.33)
  Top 0.152: v84.96,73.03 84.96,74.04 84.58,74.42 82.8,74.42 82.55,74.68 SJ20.2
  Bottom 0.152: U16.P$34 89.33,51.75 88.58,51.75 87.38,52.96 87.38,66.42 86.74,67.06 86.11,67.06 85.8,67.31 85.8,72.69 85.47,73.03 v84.96,73.03 84.96,74.04 84.58,74.42 R23.2 | 89.28,51.75 U16.P$34 | 89.79,51.37 U16.P$34
CS
  Top 0.254: U1.P$8 JP1.P$1
  Bottom 0.203: 5,21.46 U7.1
  Bottom 0.254: U7.1 5.08,30.99 5.71,31.62 JP1.P$1
CS1
  Top 0.254: U11.P$8 JP16.P$1
  Bottom 0.203: 68.96,5 U14.1
  Bottom 0.254: U14.1 59.44,5.08 58.8,5.71 JP16.P$1
CS2
  Top 0.254: U18.P$8 JP24.P$1
  Bottom 0.203: 68.96,44.37 U21.1
  Bottom 0.254: U21.1 59.44,44.45 58.8,45.09 JP24.P$1
GND  (via drill 0.33, 0.51 pad 0.18)
  Top 0.381: JP7.2 JP7.1
  Bottom 0.152: U5.9 15.94,25.15 v15.49,24.7 C11.1 | 30.92,10.6 30.35,11.18 | U6.9 16.9,17.79 16.64,17.53 | U5.11 16.52,26.15 16.26,26.42 16.26,27.05 16,27.3 15.07,27.3 C1.2 | U3.3 28.77,27.76 28.45,27.43 27.81,27.43 | U6.11 17.47,18.79 17.21,18.8 | 20.32,23.38 v20.95,22.86
  Bottom 0.203: U2.P$13 30.63,14.39 30.63,15.43 C9.2 | C2.1 17.82,30.29 16,30.29 v14.8,29.08 C1.2 | U5.18 20.3,29.08 v20.75,29.53 21.74,29.53 C3.2 | R8.1 R7.1 35.09,9.27 35.94,9.27 36.45,8.76 R4.2
  Bottom 0.254: 20.32,23.38 U5.1 | U2.P$22 31.6,1.12 32,1.52 32,2.26 U2.P$21 32.19,2.29 33.02,2.29 33.4,2.67 33.4,4.06 34.04,4.7 36.96,4.7 37.34,5.08 37.34,7.87 37,8.22 R4.2 | U2.P$13 | U2.P$13 30.36,13.98 | U2.P$13 30.23,14.11 30.23,12.7 | 30.57,14.33 U2.P$13 | 15.47,16.7 C8.2
  Bottom 0.274: R7.1 35.05,10.79 JP3.P$8 34.16,12.7 34,12.7 R3.1
  Bottom 0.318: JP2.P$1 3.43,11.3 3.81,11.68 3.81,15.24
  Bottom 0.381: 33.72,13.02 R3.1 33.66,15.49
  Bottom 0.508: 33.91,16.76 v34.8,17.65
  other vias: 19.05,47.24 16.64,44.77 21.46,44.77 21.46,49.97 16.64,49.97 15.62,19.43 17.4,4.19 13.46,11.81 16.76,16.83 25.15,18.67 25.4,33.08 8.64,30.61 17.02,34.16 27.43,17.78 19.56,5.46 1.91,17.78 3.43,22.73 29.08,10.54 17.4,15.24 10.54,15.49 36.45,27.75
  pour Top (isolate 0.127): 0,50.8 38.1,50.8 38.1,15.11 0,15.11
  pour Bottom: 0,32.26 0,50.8 38.1,50.8 38.1,32.26
  pour Bottom: 0,32.26 13.59,32.26 13.59,15.11 0,15.11
  pour Bottom: 24.13,32.26 37.97,32.26 38.1,15.11 24.26,15.11
  pour Top: 11.94,13.46 31.5,13.46 31.5,1.78 11.94,1.78
  pour Bottom: 11.94,2.03 11.94,13.21 31.5,13.21 31.5,12.57 31.5,2.03
  pour Bottom (isolate 0.203): 15.37,22.1 22.73,22.23 22.73,15.11 15.37,14.99
  pour Bottom: 16,50.29 22.1,50.29 22.1,43.94 16,43.94
GND1  (via drill 0.33, 0.51 pad 0.18)
  Top 0.381: JP11.2 JP11.1
  Bottom 0.152: U8.9 65.27,15.94 v65.72,15.49 C24.1 | 79.82,30.92 79.25,30.35 | U12.9 72.63,16.9 72.9,16.64 | U8.11 64.27,16.52 64.01,16.26 63.37,16.26 63.12,16 63.12,15.07 C14.2 | U13.3 62.67,28.77 62.99,28.45 62.99,27.81 | U12.11 71.63,17.47 71.63,17.21 | 67.04,20.32 v67.56,20.95
  Bottom 0.203: U9.P$13 76.03,30.63 74.99,30.63 C22.2 | C15.1 60.13,17.82 60.13,16 v61.34,14.8 C14.2 | U8.18 61.35,20.3 v60.9,20.75 60.9,21.74 C16.2 | R16.1 R14.1 81.15,35.09 81.15,35.94 81.66,36.45 R17.2
  Bottom 0.254: 67.04,20.32 U8.1 | U9.P$22 89.3,31.6 88.9,32 88.16,32 U9.P$21 88.14,32.19 88.14,33.02 87.76,33.4 86.36,33.4 85.72,34.04 85.72,36.96 85.34,37.34 82.55,37.34 82.21,37 R17.2 | U9.P$13 | U9.P$13 76.45,30.36 | U9.P$13 76.31,30.35 76.31,30.23 77.72,30.23 | 76.1,30.57 U9.P$13 | 73.72,15.47 C20.2
  Bottom 0.274: R14.1 79.63,35.05 JP14.P$8 77.72,34.16 77.72,34 R15.1
  Bottom 0.318: JP15.P$1 79.12,3.43 78.74,3.81 75.18,3.81
  Bottom 0.381: 77.41,33.72 R15.1 74.93,33.66
  Bottom 0.508: 73.66,33.91 v72.77,34.8
  other vias: 43.18,19.05 45.66,16.64 45.66,21.46 40.45,21.46 40.45,16.64 70.99,15.62 86.23,17.4 78.61,13.46 73.6,16.76 71.75,25.15 57.34,25.4 59.82,8.64 56.26,17.02 72.64,27.43 84.96,19.56 72.64,1.91 67.69,3.43 79.88,29.08 75.18,17.4 74.93,10.54 62.67,36.45
  pour Top (isolate 0.127): 39.62,0 39.62,38.1 75.31,38.1 75.31,0
  pour Bottom: 58.17,0 39.62,0 39.62,38.1 58.17,38.1
  pour Bottom: 58.17,0 58.17,13.59 75.31,13.59 75.31,0
  pour Bottom: 58.17,24.13 58.17,37.97 75.31,38.1 75.31,24.26
  pour Top: 76.96,11.94 76.96,31.5 88.65,31.5 88.65,11.94
  pour Bottom: 88.39,11.94 77.22,11.94 77.22,31.5 77.85,31.5 88.39,31.5
  pour Bottom (isolate 0.203): 68.33,15.37 68.2,22.73 75.31,22.73 75.44,15.37
  pour Bottom: 40.13,16 40.13,22.1 46.48,22.1 46.48,16
GND2  (via drill 0.33, 0.51 pad 0.18)
  Top 0.381: JP19.2 JP19.1
  Bottom 0.152: U15.9 65.27,55.31 v65.72,54.86 C37.1 | 79.82,70.29 79.25,69.72 | U19.9 72.63,56.27 72.9,56.01 | U15.11 64.27,55.89 64.01,55.63 63.37,55.63 63.12,55.37 63.12,54.44 C27.2 | U20.3 62.67,68.14 62.99,67.82 62.99,67.18 | U19.11 71.63,56.84 71.63,56.58 | 67.04,59.69 v67.56,60.33
  Bottom 0.203: U16.P$13 76.03,70 74.99,70 C35.2 | C28.1 60.13,57.19 60.13,55.37 v61.34,54.17 C27.2 | U15.18 61.35,59.67 v60.9,60.12 60.9,61.11 C29.2 | R25.1 R23.1 81.15,74.46 81.15,75.31 81.66,75.82 R26.2
  Bottom 0.254: 67.04,59.69 U15.1 | U16.P$22 89.3,70.97 88.9,71.37 88.16,71.37 U16.P$21 88.14,71.56 88.14,72.39 87.76,72.77 86.36,72.77 85.72,73.41 85.72,76.33 85.34,76.71 82.55,76.71 82.21,76.37 R26.2 | U16.P$13 | U16.P$13 76.45,69.73 | U16.P$13 76.31,69.72 76.31,69.6 77.72,69.6 | 76.1,69.94 U16.P$13 | 73.72,54.84 C33.2
  Bottom 0.274: R23.1 79.63,74.42 JP22.P$8 77.72,73.53 77.72,73.37 R24.1
  Bottom 0.318: JP23.P$1 79.12,42.8 78.74,43.18 75.18,43.18
  Bottom 0.381: 77.41,73.09 R24.1 74.93,73.03
  Bottom 0.508: 73.66,73.28 v72.77,74.17
  other vias: 43.18,58.42 45.66,56.01 45.66,60.83 40.45,60.83 40.45,56.01 70.99,54.99 86.23,56.77 78.61,52.83 73.6,56.13 71.75,64.52 57.34,64.77 59.82,48.01 56.26,56.39 72.64,66.8 84.96,58.93 72.64,41.27 67.69,42.8 79.88,68.45 75.18,56.77 74.93,49.91 62.67,75.82
  pour Top (isolate 0.127): 39.62,39.37 39.62,77.47 75.31,77.47 75.31,39.37
  pour Bottom: 58.17,39.37 39.62,39.37 39.62,77.47 58.17,77.47
  pour Bottom: 58.17,39.37 58.17,52.96 75.31,52.96 75.31,39.37
  pour Bottom: 58.17,63.5 58.17,77.34 75.31,77.47 75.31,63.63
  pour Top: 76.96,51.31 76.96,70.87 88.65,70.87 88.65,51.31
  pour Bottom: 88.39,51.31 77.22,51.31 77.22,70.87 77.85,70.87 88.39,70.87
  pour Bottom (isolate 0.203): 68.33,54.74 68.2,62.1 75.31,62.1 75.44,54.74
  pour Bottom: 40.13,55.37 40.13,61.47 46.48,61.47 46.48,55.37
I/O1
  Top 0.254: JP1.P$5 U1.P$4
  Bottom 0.381: JP6.6 2.67,43.05 6.48,43.05 JP1.P$5
I/O2
  Top 0.254: JP1.P$4 U1.P$5
  Bottom 0.381: JP6.5 4.95,41.78 JP1.P$4
I/O3
  Top 0.254: U1.P$18 JP4.P$3
  Bottom 0.381: JP7.5 34.16,44.32 JP4.P$3
I/O4
  Top 0.254: U1.P$19 JP4.P$4 JP7.6
I/O5
  Top 0.254: JP16.P$5 U11.P$4
  Bottom 0.381: JP10.6 47.37,2.67 47.37,6.48 JP16.P$5
I/O6
  Top 0.254: JP16.P$4 U11.P$5
  Bottom 0.381: JP10.5 48.64,4.95 JP16.P$4
I/O7
  Top 0.254: U11.P$19 JP13.P$4 JP11.6
I/O8
  Top 0.254: U11.P$18 JP13.P$3
  Bottom 0.381: JP11.5 46.1,34.16 JP13.P$3
I/O9
  Top 0.254: JP24.P$5 U18.P$4
  Bottom 0.381: JP18.6 47.37,42.04 47.37,45.85 JP24.P$5
I/O10
  Top 0.254: JP24.P$4 U18.P$5
  Bottom 0.381: JP18.5 48.64,44.32 JP24.P$4
I/O11
  Top 0.254: U18.P$19 JP21.P$4 JP19.6
I/O12
  Top 0.254: U18.P$18 JP21.P$3
  Bottom 0.381: JP19.5 46.1,73.53 JP21.P$3
MISO
  Top 0.254: JP2.P$3 U1.P$14
  Bottom 0.203: U7.2 6.35,20.32 6.1,20.07 4.83,20.07 4.32,19.56 4.32,18.03 JP2.P$3
MISO1
  Top 0.254: JP15.P$3 U11.P$14
  Bottom 0.203: U14.2 70.1,6.35 70.36,6.1 70.36,4.83 70.87,4.32 72.39,4.32 JP15.P$3
MISO2
  Top 0.254: JP23.P$3 U18.P$14
  Bottom 0.203: U21.2 70.1,45.72 70.36,45.47 70.36,44.2 70.87,43.69 72.39,43.69 JP23.P$3
MOSI
  Top 0.254: JP2.P$4 U1.P$13
  Bottom 0.203: U7.5 8.89,18.41 9.4,18.92 U1.P$13
MOSI1
  Top 0.254: JP15.P$4 U11.P$13
  Bottom 0.203: U14.5 72.01,8.89 71.5,9.4 U11.P$13
MOSI2
  Top 0.254: JP23.P$4 U18.P$13
  Bottom 0.203: U21.5 72.01,48.26 71.5,48.77 U18.P$13
MPU_INT  (via drill 0.33)
  Top 0.152: MPU_INT.1 18.92,31.11 18.03,32 v15.24,32 | v15.24,34.16 U1.P$7
  Top 0.254: JP1.P$2 U1.P$7
  Bottom 0.152: v15.24,32 v15.24,34.16
MPU_INT1  (via drill 0.33)
  Top 0.152: MPU_INT1.1 59.31,18.92 58.42,18.03 v58.42,15.24 | v56.26,15.24 U11.P$7
  Top 0.254: JP16.P$2 U11.P$7
  Bottom 0.152: v58.42,15.24 v56.26,15.24
MPU_INT2  (via drill 0.33)
  Top 0.152: MPU_INT2.1 59.31,58.29 58.42,57.4 v58.42,54.61 | v56.26,54.61 U18.P$7
  Top 0.254: JP24.P$2 U18.P$7
  Bottom 0.152: v58.42,54.61 v56.26,54.61
N$1
  Bottom 0.152: U5.10 14.9,25.65 C1.1
N$2
  Bottom 0.203: U5.20 21.52,26.15 21.78,26.42 21.78,27.79 C3.1
N$3  (via drill 0.33)
  Top 0.203: D1.2 30.82,9.74 31.37,10.29 v33.66,10.29
  Bottom 0.203: v33.66,10.29 R3.2
N$4
  cutout Bottom: 17.53,20.07 17.53,17.02 20.57,17.02 20.57,20.07
N$5
  Bottom 0.152: C7.1 14.29,16.07 14.48,15.88 18.03,15.88 18.3,16.14 U6.8
N$6
  Bottom 0.152: U6.12 17.28,19.29 16.51,20.07 14.31,20.07 C7.2
N$7
  Top 0.254: JP1.P$3 U1.P$6
N$8
  Top 0.254: JP2.P$5 U1.P$12
N$9  (via drill 0.33)
  Top 0.203: SJ4.2 18.29,14.99 18.54,15.24 v19.05,15.24
  Bottom 0.152: v19.05,15.24 19.72,15.24 R5.1
N$10
  Top 0.254: U1.P$24 JP3.P$1
N$11
  Bottom 0.152: U6.10 15.2,18.29 C8.1
N$12
  Top 0.254: JP2.P$6 U1.P$11
N$13  (via drill 0.33)
  Top 0.203: D2.2 32.89,1.52 33.4,2.03 33.4,4.06 34.04,4.7 35.69,4.7 v36.45,5.46
  Bottom 0.203: R4.1 v36.45,5.46
N$14  (via drill 0.33)
  Top 0.152: 27.94,3.3 27.94,7.71 D1.1
  Top 0.203: v30.73,3.3 30.23,2.79 28.45,2.79 27.94,3.3
  Bottom 0.203: U2.P$31 16.86,1.87 17.14,2.16 30.35,2.16 30.73,2.54 v30.73,3.3
N$15
  Bottom 0.381: D4.3 26.08,49.87 U1.P$15
N$16  (via drill 0.33)
  Top 0.152: v17.02,27.56 17.02,28.07 17.27,28.32 18.86,28.32 MPU_INT.2
  Bottom 0.152: v17.02,27.56 17.02,26.68 U5.12
N$17  (via drill 0.33)
  Top 0.152: 17.91,20.83 SJ7.2
  Top 0.203: v21.08,17.02 21.08,20.32 20.57,20.83 v18.54,20.83 17.91,20.83
  Bottom 0.152: U6.13 18.3,20.59 v18.54,20.83
  Bottom 0.203: U6.2 21.51,18.79 C6.1 | U6.4 21.64,17.79 C6.1 | v21.08,17.02 21.08,17.23 C6.1
N$18
  Bottom 0.254: U1.P$20 JP4.P$5
N$19
  Bottom 0.254: U1.P$21 JP4.P$6
N$20
  cutout Top: 15.88,38.99 22.23,38.99 22.23,34.16 15.88,34.16
N$21
  Bottom 0.152: 28.78,26.86 U3.2 28.7,26.8 28.7,26.42 28.51,26.23 28.13,26.23 27.81,25.91 27.81,25.02 C10.1
N$22
  Bottom 0.381: D5.1 R9.2
N$23
  Top 0.254: U1.P$25 JP3.P$2
N$24  (via drill 0.33)
  Top 0.203: D3.2 30.82,5.93 31.37,6.48 v33.66,6.48
  Bottom 0.203: R8.2 v33.66,6.48
N$25
  cutout Bottom: 29.72,15.24 29.72,16.38 30.35,16.38 30.35,15.24
N$26
  cutout Bottom: 22.35,15.11 26.29,16.13 26.29,17.97 22.35,17.97
N$27
  Bottom 0.152: U8.10 64.77,14.9 C14.1
N$28
  cutout Bottom: 28.57,29.84 31.37,29.84 31.37,25.15 28.57,25.15
N$29
  Bottom 0.203: U8.20 64.27,21.52 64.01,21.78 62.63,21.78 C16.1
N$30
  Top 0.254: JP16.P$3 U11.P$6
N$31
  Top 0.254: JP15.P$6 U11.P$11
N$32
  Bottom 0.254: U11.P$20 JP13.P$5
N$33
  Bottom 0.254: U11.P$21 JP13.P$6
N$34
  Top 0.254: U11.P$25 JP14.P$2
N$35
  Bottom 0.152: C19.1 74.36,14.29 74.55,14.48 74.55,18.03 74.28,18.3 U12.8
N$36
  Bottom 0.152: U12.12 71.13,17.28 70.36,16.51 70.36,14.31 C19.2
N$37
  Bottom 0.152: U12.10 72.13,15.2 C20.1
N$38  (via drill 0.33)
  Top 0.152: v62.87,17.02 62.36,17.02 62.1,17.27 62.1,18.86 MPU_INT1.2
  Bottom 0.152: v62.87,17.02 63.74,17.02 U8.12
N$39
  cutout Top: 51.44,15.88 51.44,22.23 56.26,22.23 56.26,15.88
N$40
  Bottom 0.152: 63.56,28.78 U13.2 63.62,28.7 64.01,28.7 64.2,28.51 64.2,28.13 64.52,27.81 65.41,27.81 C23.1
N$41  (via drill 0.33)
  Top 0.203: D7.2 80.68,30.82 80.14,31.37 v80.14,33.66
  Bottom 0.203: v80.14,33.66 R15.2
N$42
  cutout Bottom: 60.58,28.57 60.58,31.37 65.28,31.37 65.28,28.57
N$43  (via drill 0.33)
  Top 0.203: D9.2 84.49,30.82 83.95,31.37 v83.95,33.66
  Bottom 0.203: R16.2 v83.95,33.66
N$44
  cutout Bottom: 75.18,29.72 74.04,29.72 74.04,30.35 75.18,30.35
N$45
  cutout Bottom: 75.31,22.35 74.3,26.29 72.45,26.29 72.45,22.35
N$46
  cutout Bottom: 70.36,17.53 73.41,17.53 73.41,20.57 70.36,20.57
N$47
  Top 0.254: U11.P$24 JP14.P$1
N$48  (via drill 0.33)
  Top 0.203: D8.2 88.9,32.89 88.39,33.4 86.36,33.4 85.72,34.04 85.72,35.69 v84.96,36.45
  Bottom 0.203: R17.1 v84.96,36.45
N$49  (via drill 0.33)
  Top 0.203: SJ11.2 75.44,18.29 75.18,18.54 v75.18,19.05
  Bottom 0.152: v75.18,19.05 75.18,19.72 R12.1
N$50  (via drill 0.33)
  Top 0.152: 87.12,27.94 82.72,27.94 D7.1
  Top 0.203: v87.12,30.73 87.63,30.23 87.63,28.45 87.12,27.94
  Bottom 0.203: U9.P$31 88.55,16.86 88.27,17.14 88.27,30.35 87.88,30.73 v87.12,30.73
N$51
  Top 0.254: JP15.P$5 U11.P$12
N$52
  Bottom 0.381: D10.3 40.56,26.08 U11.P$15
N$53  (via drill 0.33)
  Top 0.152: 69.6,17.91 SJ14.2
  Top 0.203: v73.41,21.08 70.1,21.08 69.6,20.57 v69.6,18.54 69.6,17.91
  Bottom 0.152: U12.13 69.84,18.3 v69.6,18.54
  Bottom 0.203: U12.2 71.63,21.51 C21.1 | U12.4 72.63,21.64 C21.1 | v73.41,21.08 73.19,21.08 C21.1
N$54
  Bottom 0.381: D11.1 R18.2
N$55
  Bottom 0.152: U15.10 64.77,54.27 C27.1
N$56
  Bottom 0.203: U15.20 64.27,60.88 64.01,61.15 62.63,61.15 C29.1
N$57
  Top 0.254: JP24.P$3 U18.P$6
N$58
  Top 0.254: JP23.P$6 U18.P$11
N$59
  Bottom 0.254: U18.P$20 JP21.P$5
N$60
  Bottom 0.254: U18.P$21 JP21.P$6
N$61
  Top 0.254: U18.P$25 JP22.P$2
N$62
  Bottom 0.152: C32.1 74.36,53.66 74.55,53.85 74.55,57.4 74.28,57.67 U19.8
N$63
  Bottom 0.152: U19.12 71.13,56.65 70.36,55.88 70.36,53.68 C32.2
N$64
  Bottom 0.152: U19.10 72.13,54.57 C33.1
N$65  (via drill 0.33)
  Top 0.152: v62.87,56.39 62.36,56.39 62.1,56.64 62.1,58.23 MPU_INT2.2
  Bottom 0.152: v62.87,56.39 63.74,56.39 U15.12
N$66
  cutout Top: 51.44,55.24 51.44,61.59 56.26,61.59 56.26,55.24
N$67
  Bottom 0.152: 63.56,68.15 U20.2 63.62,68.07 64.01,68.07 64.2,67.88 64.2,67.5 64.52,67.18 65.41,67.18 C36.1
N$68  (via drill 0.33)
  Top 0.203: D13.2 80.68,70.19 80.14,70.74 v80.14,73.03
  Bottom 0.203: v80.14,73.03 R24.2
N$69
  cutout Bottom: 60.58,67.94 60.58,70.74 65.28,70.74 65.28,67.94
N$70  (via drill 0.33)
  Top 0.203: D15.2 84.49,70.19 83.95,70.74 v83.95,73.03
  Bottom 0.203: R25.2 v83.95,73.03
N$71
  cutout Bottom: 75.18,69.09 74.04,69.09 74.04,69.72 75.18,69.72
N$72
  cutout Bottom: 75.31,61.72 74.3,65.66 72.45,65.66 72.45,61.72
N$73
  cutout Bottom: 70.36,56.9 73.41,56.9 73.41,59.94 70.36,59.94
N$74
  Top 0.254: U18.P$24 JP22.P$1
N$75  (via drill 0.33)
  Top 0.203: D14.2 88.9,72.26 88.39,72.77 86.36,72.77 85.72,73.41 85.72,75.06 v84.96,75.82
  Bottom 0.203: R26.1 v84.96,75.82
N$76  (via drill 0.33)
  Top 0.203: SJ18.2 75.44,57.66 75.18,57.91 v75.18,58.42
  Bottom 0.152: v75.18,58.42 75.18,59.09 R21.1
N$77  (via drill 0.33)
  Top 0.152: 87.12,67.31 82.72,67.31 D13.1
  Top 0.203: v87.12,70.1 87.63,69.6 87.63,67.82 87.12,67.31
  Bottom 0.203: U16.P$31 88.55,56.23 88.27,56.52 88.27,69.72 87.88,70.1 v87.12,70.1
N$78
  Top 0.254: JP23.P$5 U18.P$12
N$79
  Bottom 0.381: D16.3 40.56,65.45 U18.P$15
N$80  (via drill 0.33)
  Top 0.152: 69.6,57.28 SJ21.2
  Top 0.203: v73.41,60.45 70.1,60.45 69.6,59.94 v69.6,57.91 69.6,57.28
  Bottom 0.152: U19.13 69.84,57.67 v69.6,57.91
  Bottom 0.203: U19.2 71.63,60.88 C34.1 | U19.4 72.63,61.01 C34.1 | v73.41,60.45 73.19,60.45 C34.1
N$81
  Bottom 0.381: D17.1 R27.2
POW_I/O1  (via drill 0.33)
  Top 0.254: JP6.4 JP6.3 5.71,39.24 6.1,38.86 6.1,38.35 6.48,37.97 14.03,37.97 v15.11,36.89
  Bottom 0.381: v15.11,36.89 SJ2.2
POW_I/O2  (via drill 0.33)
  Top 0.254: JP7.3 JP7.4 32.77,39.24 32.38,38.86 32.38,38.35 32,37.97 25.91,37.97 24.83,36.89 v22.99,36.89
  Bottom 0.254: SJ3.2 v22.99,36.89
POW_I/O3  (via drill 0.33)
  Top 0.254: JP11.3 JP11.4 51.18,32.77 51.56,32.38 52.07,32.38 52.45,32 52.45,25.91 53.53,24.83 v53.53,22.99
  Bottom 0.254: SJ9.2 v53.53,22.99
POW_I/O4  (via drill 0.33)
  Top 0.254: JP10.4 JP10.3 51.18,5.71 51.56,6.1 52.07,6.1 52.45,6.48 52.45,14.03 v53.53,15.11
  Bottom 0.381: v53.53,15.11 SJ10.2
POW_I/O5  (via drill 0.33)
  Top 0.254: JP19.3 JP19.4 51.18,72.14 51.56,71.75 52.07,71.75 52.45,71.37 52.45,65.28 53.53,64.2 v53.53,62.36
  Bottom 0.254: SJ16.2 v53.53,62.36
POW_I/O6  (via drill 0.33)
  Top 0.254: JP18.4 JP18.3 51.18,45.09 51.56,45.47 52.07,45.47 52.45,45.85 52.45,53.4 v53.53,54.48
  Bottom 0.381: v53.53,54.48 SJ17.2
RX1  (via drill 0.33)
  Top 0.152: v17.27,7.11 v15.62,7.11
  Top 0.254: JP1.P$7 U1.P$2
  Bottom 0.152: 12.38,14.1 U2.P$1 12.45,14.03 12.45,10.29 v15.62,7.11 | JP9.2 25.21,6.79 24.89,7.11 v17.27,7.11
  Bottom 0.254: U1.P$2 11.56,46.86 12.7,45.72 12.7,14.59 U2.P$1
RX2
  Top 0.254: JP15.P$8 U11.P$9
RX3
  Top 0.254: JP2.P$8 U1.P$9
RX4  (via drill 0.33)
  Top 0.152: v83.31,17.27 v83.31,15.62
  Top 0.254: JP16.P$7 U11.P$2
  Bottom 0.152: 76.33,12.38 U9.P$1 76.39,12.45 80.14,12.45 v83.31,15.62 | JP12.2 83.63,25.21 83.31,24.89 v83.31,17.27
  Bottom 0.254: U11.P$2 43.56,11.56 44.7,12.7 75.84,12.7 U9.P$1
RX5
  Top 0.254: JP23.P$8 U18.P$9
RX6  (via drill 0.33)
  Top 0.152: v83.31,56.64 v83.31,54.99
  Top 0.254: JP24.P$7 U18.P$2
  Bottom 0.152: 76.33,51.75 U16.P$1 76.39,51.82 80.14,51.82 v83.31,54.99 | JP20.2 83.63,64.58 83.31,64.26 v83.31,56.64
  Bottom 0.254: U18.P$2 43.56,50.93 44.7,52.07 75.84,52.07 U16.P$1
SCK  (via drill 0.33)
  Top 0.203: v22.86,16.38 22.48,16 14.35,16 14.1,16.26 14.1,17.27 13.84,17.53 10.41,17.53 9.91,18.03 v8.13,18.03
  Top 0.254: U1.P$28 JP3.P$5
  Bottom 0.203: v22.86,16.38 U1.P$28 | v8.13,18.03 7.62,17.53 U7.6
SCK1  (via drill 0.33)
  Top 0.203: v74.04,22.86 74.42,22.48 74.42,14.35 74.17,14.1 73.15,14.1 72.9,13.84 72.9,10.41 72.39,9.91 v72.39,8.13
  Top 0.254: U11.P$28 JP14.P$5
  Bottom 0.203: v74.04,22.86 U11.P$28 | v72.39,8.13 72.9,7.62 U14.6
SCK2  (via drill 0.33)
  Top 0.203: v74.04,62.23 74.42,61.85 74.42,53.72 74.17,53.47 73.15,53.47 72.9,53.21 72.9,49.78 72.39,49.28 v72.39,47.5
  Top 0.254: U18.P$28 JP22.P$5
  Bottom 0.203: v74.04,62.23 U18.P$28 | v72.39,47.5 72.9,46.99 U21.6
SCL  (via drill 0.33)
  Top 0.203: v22.61,23.11 v22.61,25.4
  Top 0.254: U1.P$22 JP4.P$7
  Bottom 0.152: U3.8 31.97,25.49 32.89,26.42 32.89,33.78 32.51,34.16 JP4.P$7
  Bottom 0.203: U5.23 21.06,24.64 22.35,24.64 22.61,24.89 v22.61,25.4 22.61,31.41 R1.1 22.82,31.62 U1.P$22 | U6.1 21.32,19.29 22.61,20.57 v22.61,23.11
SCL1  (via drill 0.33)
  Top 0.203: v67.31,22.61 v65.02,22.61
  Top 0.254: U11.P$22 JP13.P$7
  Bottom 0.152: U13.8 64.93,31.97 64.01,32.89 56.64,32.89 56.26,32.51 JP13.P$7
  Bottom 0.203: U8.23 65.79,21.06 65.79,22.35 65.53,22.61 v65.02,22.61 59.02,22.61 R10.1 58.8,22.82 U11.P$22 | U12.1 71.13,21.32 69.85,22.61 v67.31,22.61
SCL2  (via drill 0.33)
  Top 0.203: v67.31,61.98 v65.02,61.98
  Top 0.254: U18.P$22 JP21.P$7
  Bottom 0.152: U20.8 64.93,71.34 64.01,72.26 56.64,72.26 56.26,71.88 JP21.P$7
  Bottom 0.203: U15.23 65.79,60.43 65.79,61.72 65.53,61.98 v65.02,61.98 59.02,61.98 R19.1 58.8,62.19 U18.P$22 | U19.1 71.13,60.69 69.85,61.98 v67.31,61.98
SDA
  Top 0.254: U1.P$23 JP4.P$8
  Bottom 0.152: U3.7 31.89,26.74 32.38,27.24 32.38,31.24 32,31.62 JP4.P$8
  Bottom 0.203: 22.1,24.13 23.11,24.13 23.37,24.38 23.37,28.26 23.69,28.57 25.17,28.57 R2.1 26.2,28.61 U1.P$23 | 22.1,24.13 21.07,24.13 U5.24 | U6.16 19.8,21.7 20.07,21.97 21.34,21.97 21.72,22.35 21.72,23.75 22.1,24.13
SDA1
  Top 0.254: U11.P$23 JP13.P$8
  Bottom 0.152: U13.7 63.68,31.89 63.18,32.38 59.18,32.38 58.8,32 JP13.P$8
  Bottom 0.203: 66.29,22.1 66.29,23.11 66.04,23.37 62.17,23.37 61.85,23.69 61.85,25.17 R11.1 61.81,26.2 U11.P$23 | 66.29,22.1 66.29,21.07 U8.24 | U12.16 68.72,19.8 68.45,20.07 68.45,21.34 68.07,21.72 66.67,21.72 66.29,22.1
SDA2
  Top 0.254: U18.P$23 JP21.P$8
  Bottom 0.152: U20.7 63.68,71.26 63.18,71.75 59.18,71.75 58.8,71.37 JP21.P$8
  Bottom 0.203: 66.29,61.47 66.29,62.48 66.04,62.74 62.17,62.74 61.85,63.06 61.85,64.54 R20.1 61.81,65.57 U18.P$23 | 66.29,61.47 66.29,60.44 U15.24 | U19.16 68.72,59.17 68.45,59.44 68.45,60.71 68.07,61.09 66.67,61.09 66.29,61.47
TEENSY_3V1  (via drill 0.33)
  Top 0.203: v67.44,10.54 v67.44,13.97 | v69.66,15.88 69.66,16.57 SJ14.1
  Top 0.254: v74.99,28 74.99,24.45 74.68,24.13 v71.12,24.13
  Top 0.305: v57.66,24.13 v60.13,24.13 v63.06,24.13
  Top 0.381: U11.P$17 44.83,25.4 42.93,25.4 42.29,24.77 42.29,8.13 41.78,7.62 JP16.P$8
  Bottom 0.152: U8.8 65.77,16.52 65.91,16.38 68.26,16.38 68.58,16.07 68.58,15.53 | U13.1 64.93,29.43 64.64,29.72 61.47,29.72 61.18,29.43 U13.4 | 68.92,15.88 68.58,15.53 | 68.58,15.53 C24.2
  Bottom 0.203: 58.8,18.29 59.18,17.91 59.18,14.22 59.44,13.97 v67.44,13.97 68.33,13.97 68.58,14.22 68.58,15.53 | v63.06,24.13 63.06,25.04 C25.2 62.61,25.95 62.61,27.3 62.23,27.69 61.47,27.69 61.18,27.97 U13.4 61.09,28.74 | 59.18,18.92 58.93,19.18 R10.2 | v60.13,24.13 60.13,25.18 R11.2 | U14.8 U14.7 71.12,6.35 70.61,6.86 70.61,7.37 70.36,7.62 U14.3 67.06,7.62 C26.2 67.44,8.09 v67.44,10.54 | v69.66,15.88 68.92,15.88 C24.2
  Bottom 0.254: U8.13 61.85,17.8 C15.2 61.81,18.58 61.47,18.92 59.18,18.92 58.8,18.54 58.8,18.29 58.04,18.29 57.66,18.67 v57.66,24.13 | U9.P$11 75.64,27.36 v74.99,28 74.99,28.93 C22.1 75.06,28.86 U9.P$12 | v63.06,24.13 v71.12,24.13
  Bottom 0.318: SJ9.3 52.64,23.05 51.56,24.13
  Bottom 0.381: v57.66,24.13 51.56,24.13 51.05,24.64 46.48,24.64 46.1,25.02 U11.P$17 | D11.3 41.4,13.97 41.66,13.72 41.66,12.32 42.29,11.68 42.29,8.13 41.78,7.62 JP16.P$8 | SJ10.3 52.72,21.51 SJ9.3
TEENSY_3V2  (via drill 0.33)
  Top 0.203: v67.44,49.91 v67.44,53.34 | v69.66,55.24 69.66,55.94 SJ21.1
  Top 0.254: v74.99,67.37 74.99,63.82 74.68,63.5 v71.12,63.5
  Top 0.305: v57.66,63.5 v60.13,63.5 v63.06,63.5
  Top 0.381: U18.P$17 44.83,64.77 42.93,64.77 42.29,64.14 42.29,47.5 41.78,46.99 JP24.P$8
  Bottom 0.152: U15.8 65.77,55.89 65.91,55.75 68.26,55.75 68.58,55.44 68.58,54.9 | U20.1 64.93,68.8 64.64,69.09 61.47,69.09 61.18,68.8 U20.4 | 68.92,55.24 68.58,54.9 | 68.58,54.9 C37.2
  Bottom 0.203: 58.8,57.66 59.18,57.28 59.18,53.59 59.44,53.34 v67.44,53.34 68.33,53.34 68.58,53.59 68.58,54.9 | v63.06,63.5 63.06,64.41 C38.2 62.61,65.32 62.61,66.67 62.23,67.06 61.47,67.06 61.18,67.34 U20.4 61.09,68.11 | 59.18,58.29 58.93,58.55 R19.2 | v60.13,63.5 60.13,64.56 R20.2 | U21.8 U21.7 71.12,45.72 70.61,46.23 70.61,46.74 70.36,46.99 U21.3 67.06,46.99 C39.2 67.44,47.46 v67.44,49.91 | v69.66,55.24 68.92,55.24 C37.2
  Bottom 0.254: U15.13 61.85,57.17 C28.2 61.81,57.95 61.47,58.29 59.18,58.29 58.8,57.91 58.8,57.66 58.04,57.66 57.66,58.04 v57.66,63.5 | U16.P$11 75.64,66.73 v74.99,67.37 74.99,68.3 C35.1 75.06,68.23 U16.P$12 | v63.06,63.5 v71.12,63.5
  Bottom 0.318: SJ16.3 52.64,62.42 51.56,63.5
  Bottom 0.381: v57.66,63.5 51.56,63.5 51.05,64.01 46.48,64.01 46.1,64.39 U18.P$17 | D17.3 41.4,53.34 41.66,53.09 41.66,51.69 42.29,51.05 42.29,47.5 41.78,46.99 JP24.P$8 | SJ17.3 52.72,60.88 SJ16.3
TEENSY_3V3  (via drill 0.33)
  Top 0.203: v10.54,22.99 v13.97,22.99 | v15.88,20.77 16.57,20.77 SJ7.1
  Top 0.254: v28,15.43 24.45,15.43 24.13,15.75 v24.13,19.3
  Top 0.305: v24.13,32.77 v24.13,30.29 v24.13,27.37
  Top 0.381: U1.P$17 25.4,45.59 25.4,47.5 24.77,48.13 8.13,48.13 7.62,48.64 JP1.P$8
  Bottom 0.152: U5.8 16.52,24.65 16.38,24.51 16.38,22.16 16.07,21.84 15.53,21.84 | U3.1 29.43,25.49 29.72,25.78 29.72,28.96 29.43,29.24 U3.4 | 15.88,21.5 15.53,21.84 | 15.53,21.84 C11.2
  Bottom 0.203: 18.29,31.62 17.91,31.24 14.22,31.24 13.97,30.99 v13.97,22.99 13.97,22.1 14.22,21.84 15.53,21.84 | v24.13,27.37 25.04,27.37 C12.2 25.95,27.81 27.3,27.81 27.69,28.19 27.69,28.96 27.97,29.24 U3.4 28.74,29.34 | 18.92,31.24 19.18,31.5 R1.2 | v24.13,30.29 25.18,30.29 R2.2 | U7.8 U7.7 6.35,19.3 6.86,19.81 7.37,19.81 7.62,20.07 U7.3 7.62,23.37 C13.2 8.09,22.99 v10.54,22.99 | v15.88,20.77 15.88,21.5 C11.2
  Bottom 0.254: U5.13 17.8,28.57 C2.2 18.58,28.61 18.92,28.96 18.92,31.24 18.54,31.62 18.29,31.62 18.29,32.38 18.67,32.77 v24.13,32.77 | U2.P$11 27.36,14.79 v28,15.43 28.93,15.43 C9.1 28.86,15.36 U2.P$12 | v24.13,27.37 v24.13,19.3
  Bottom 0.318: SJ3.3 23.05,37.78 24.13,38.86
  Bottom 0.381: v24.13,32.77 24.13,38.86 24.64,39.37 24.64,43.94 25.02,44.32 U1.P$17 | D5.3 13.97,49.02 13.72,48.77 12.32,48.77 11.68,48.13 8.13,48.13 7.62,48.64 JP1.P$8 | SJ2.3 21.51,37.71 SJ3.3
TX1  (via drill 0.33)
  Top 0.254: v13.34,43.05 13.34,44.07 13.08,44.32 U1.P$3 JP1.P$6
  Bottom 0.152: JP9.1 18.73,4.25 16.38,6.6 16.38,7.37 14.22,9.53 14.22,13.76 U2.P$2
  Bottom 0.254: v13.34,43.05 13.34,14.64 U2.P$2
TX2
  Top 0.254: U11.P$10 JP15.P$7
TX3
  Top 0.254: U1.P$10 JP2.P$7
TX4  (via drill 0.33)
  Top 0.254: v47.37,13.34 46.35,13.34 46.1,13.08 U11.P$3 JP16.P$6
  Bottom 0.152: JP12.1 86.17,18.73 83.82,16.38 83.06,16.38 80.9,14.22 76.67,14.22 U9.P$2
  Bottom 0.254: v47.37,13.34 75.78,13.34 U9.P$2
TX5
  Top 0.254: U18.P$10 JP23.P$7
TX6  (via drill 0.33)
  Top 0.254: v47.37,52.7 46.35,52.7 46.1,52.45 U18.P$3 JP24.P$6
  Bottom 0.152: JP20.1 86.17,58.1 83.82,55.75 83.06,55.75 80.9,53.59 76.67,53.59 U16.P$2
  Bottom 0.254: v47.37,52.7 75.78,52.7 U16.P$2
VBATT  (via drill 0.33)
  Top 0.508: v19.05,40.13 19.05,34.54 17.4,32.89 1.65,32.89 1.02,32.26 1.02,14.48 1.65,13.84 JP2.P$2 D6.A SJ6.1 SJ6.2 D6.C 16.65,13.21 SJ4.1 18.29,10.92 17.8,10.43 JP5.P$3
  Bottom 0.254: C4.1 22.05,39.41 U4.P$2
  Bottom 0.508: v19.05,40.13 21.34,40.13 U4.P$2
VBATT1  (via drill 0.33)
  Top 0.508: v50.29,19.05 55.88,19.05 57.53,17.4 57.53,1.65 58.17,1.02 75.95,1.02 76.58,1.65 JP15.P$2 D12.A SJ12.1 SJ12.2 D12.C 77.22,16.65 SJ11.1 79.5,18.29 79.99,17.8 JP8.P$3
  Bottom 0.254: C17.1 51.02,22.05 U10.P$2
  Bottom 0.508: v50.29,19.05 U10.P$2
VBATT2  (via drill 0.33)
  Top 0.508: v50.29,58.42 55.88,58.42 57.53,56.77 57.53,41.02 58.17,40.39 75.95,40.39 76.58,41.02 JP23.P$2 D18.A SJ19.1 SJ19.2 D18.C 77.22,56.02 SJ18.1 79.5,57.66 79.99,57.17 JP17.P$3
  Bottom 0.254: C30.1 51.02,61.42 U17.P$2
  Bottom 0.508: v50.29,58.42 U17.P$2
YEL_LED  (via drill 0.33)
  Top 0.203: v29.46,3.56 29.46,4.74 D3.1
  Bottom 0.203: U2.P$32 15.36,2.28 15.75,2.67 28.57,2.67 v29.46,3.56
YEL_LED1  (via drill 0.33)
  Top 0.203: v86.87,29.46 85.69,29.46 D9.1
  Bottom 0.203: U9.P$32 88.14,15.36 87.76,15.75 87.76,28.57 v86.87,29.46
YEL_LED2  (via drill 0.33)
  Top 0.203: v86.87,68.83 85.69,68.83 D15.1
  Bottom 0.203: U16.P$32 88.14,54.73 87.76,55.12 87.76,67.94 v86.87,68.83

## Text on the board
tNames: 4 | ~ | 3 | CMD | ~ | 17 | 16 | 15 | 14 | 13 | ASDA | ASCL | GND | 5V | GND | 23 | S | + | - | 19 | 18 | 5V | GND | 23 | 22 | 21 | 20 | 19 | 18 | BT | PWR | - | INT | V0.2.5 | Y | Mag | Voltage | Sense | Duo/Quad | IMU | X | Z | Sep 2013 | + | 5V | 5V | 3v3 | 3v3 | 3v3 | 0 | 1 | 2 | 3 | 4 | 5 | 6 | 0 | 0 | Duo/Quad | GND | GND | 10 | 11 | 12 | 1 | 2 | 3 | 4 | 3v3 | 0 | 1 | S | + | - | 5 | 6 | 7 | 8 | 9 | IMU | 1 | 1 | 2 | Vin | GND | V0.2.5 | 23 | 23 | ~ | ~ | ~ | S | S | ~ | ~ | 2 | 22 | 1 | ~ | + | 3 | Sep 2013 | + | 21 | - | - | 4 | 4 | 20 | ~ | CMD | 5 | 5 | 19 | 3 | ~ | 17 | 16 | 15 | 14 | 13 | ASDA | ASCL | GND | 19 | 6 | 18 | 5V | GND | 23 | S | + | - | 19 | 18 | 6 | IMU | INT | 18 | 17 | 5V | GND | 23 | 22 | 21 | 20 | 19 | 18 | BT | 7 | 16 | 8 | X | PWR | Y | 15 | - | 9 | Z | 10 | 14 | INT | Mag | Y | Voltage | Sense | 13 | Duo/Quad | V0.2.5 | Mag | 11 | IMU | X | Z | ASDA | 12 | Sep 2013 | + | Vin | Voltage | ASCL | Sense | GND | GND | + | - | 3v3 | 0 | 1 | 2 | 3 | 4 | 5 | 6 | BT | CMD | 3v3 | S | + | - | 5 | 6 | 7 | 8 | 9 | 10 | 11 | 12 | 0 | 1 | Vin | GND | IMU | 2 | ~ | IMU | 1 | PWR | ~
bNames: GND | ASDA | ASCL | 17 | 16 | 15 | 14 | 13 | S | + | - | 23 | 22 | 21 | 20 | 19 | 18 | GND | 5V | 5V | GND | RX | TX | 3v3 | 5v | 5V | 3v3 | 3v3 | GND | 0 | 1 | 2 | 3 | 4 | 5 | 6 | 0 | GND | GND | S | + | - | 1 | 23 | VIN | GND | 7 | 8 | 9 | S | 2 | 22 | S | + | 3 | 21 | + | 3v3 | - | 4 | 20 | - | GND | 5v | ASCL | 5 | 19 | 17 | 16 | 15 | 14 | 13 | ASDA | 6 | 18 | S | + | - | 7 | 17 | GND | 23 | 22 | 21 | 20 | 19 | 18 | 8 | 16 | 5V | 5V | GND | RX | TX | 9 | 15 | 14 | 13 | 3v3 | 5v | ASDA | ASCL | VIN | 5V | GND | GND | 3v3 | GND | 0 | 1 | 2 | 3 | 4 | 5 | 6 | RX | S | + | - | GND | TX | 7 | 8 | 9 | VIN | GND